# EAGLE board rectifier_board (EAGLE 9.6.2)
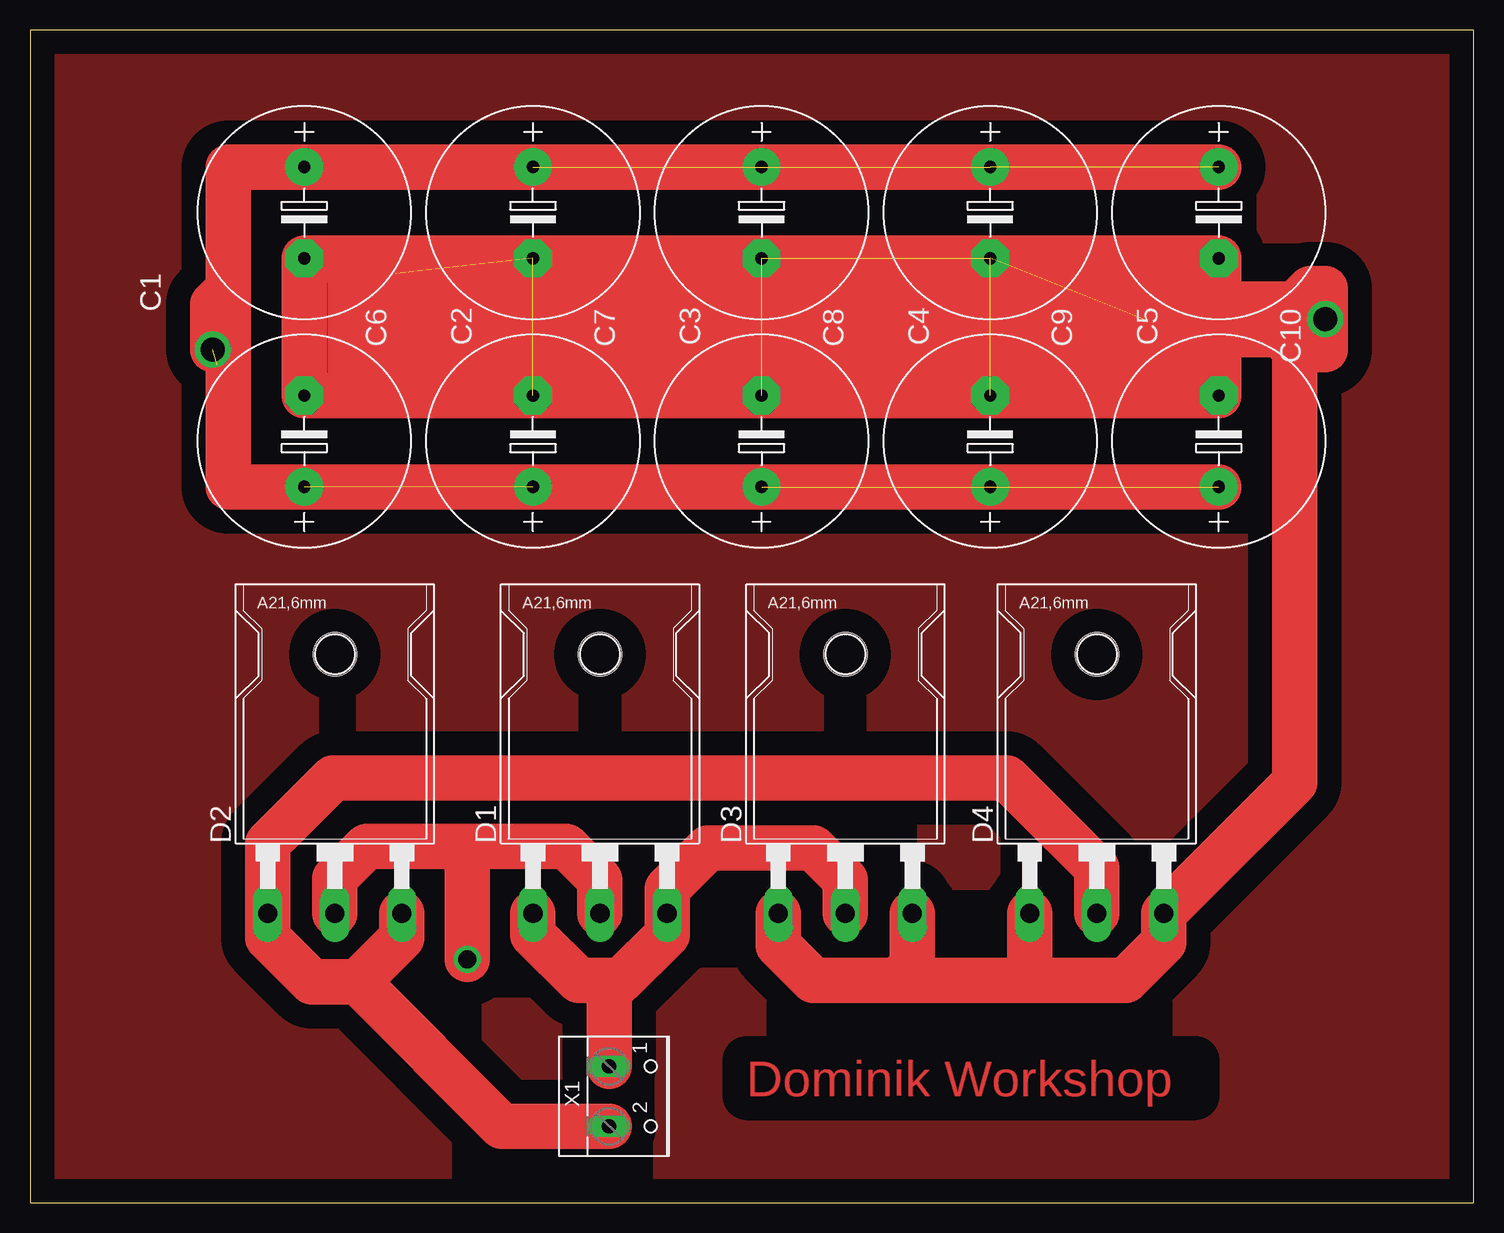
[diagram p0: board, top side]
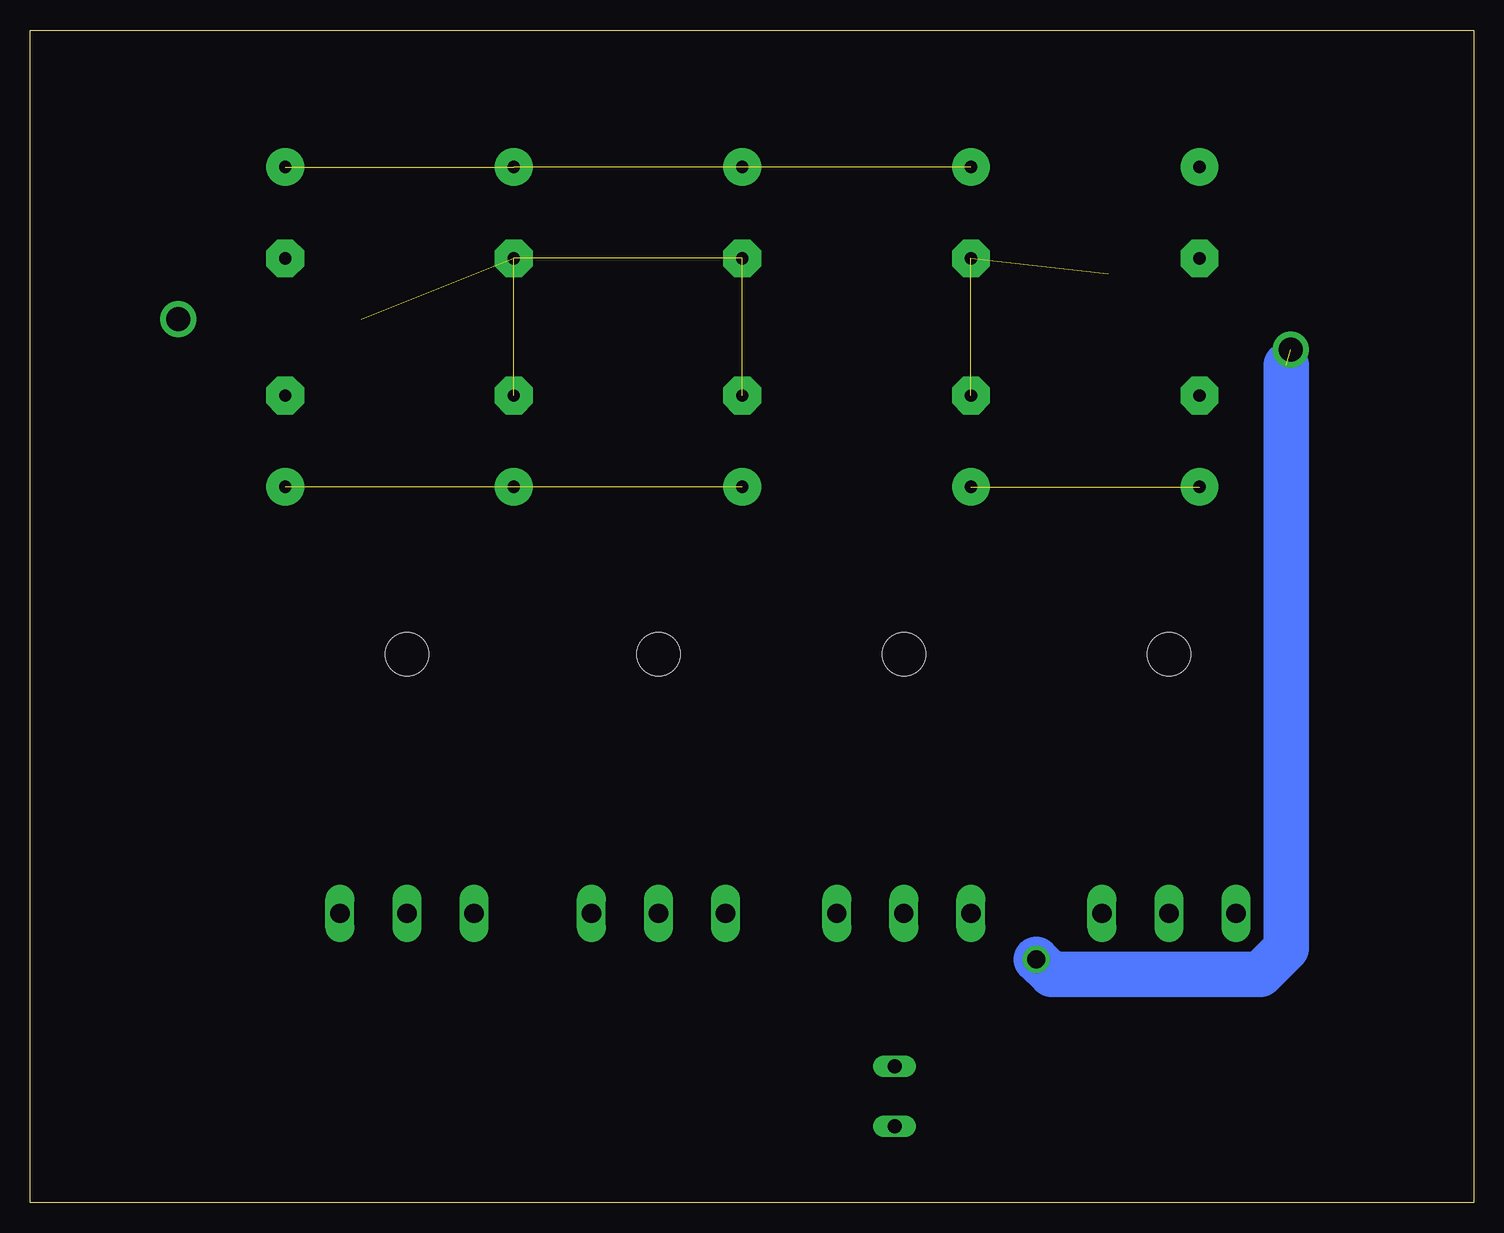
[diagram p1: board, bottom side, seen from below]

Size 120.32 x 97.78 mm. Coordinates in mm from the lower left corner, seen from the top.
Outline: 0,0 120.32,0 120.32,97.78 0,97.78 0,0
Copper layers (1*16): Top 0.035mm / dielectric 1.5mm / Bottom 0.035mm
Design rules "default": minimum track width 6mil, minimum drill 0.35mm, track to track 6mil, track to pad 6mil, pad to pad 6mil, via to via 6mil, smd to smd 6mil, copper to edge 40mil, drill to drill 6mil, minimum pad ring 10mil, minimum via ring 8mil, stop-mask expansion 4mil, vias tented up to drill 0mil, thermal gap 10mil

## Footprints (pad centres in the part's own frame; a part is rotated, then mirrored left to right if it is on the bottom)
E7,5-18 = drill 1.016 pad 3.15: + -3.81,0 | drill 1.016 pad 3.15 octagon: - 3.81,0
TO3P = drill 1.6 long: 1 -5.588,-7.62; 2 0,-7.62; 3 5.588,-7.62 | hole 3.607: 0,13.97
W237-102 = drill 1.194 long: 1 -2.5,-1.27; 2 2.5,-1.27

## Placement (x,y rotation side)
C1  [E7,5-18]  22.86,63.5 90 top
C2  [E7,5-18]  41.91,63.5 90 top
C3  [E7,5-18]  60.96,63.5 90 top
C4  [E7,5-18]  80.01,63.5 90 top
C5  [E7,5-18]  99.06,63.5 90 top
C6  [E7,5-18]  22.86,82.55 270 top
C7  [E7,5-18]  41.91,82.55 270 top
C8  [E7,5-18]  60.96,82.55 270 top
C9  [E7,5-18]  80.01,82.55 270 top
C10  [E7,5-18]  99.06,82.55 270 top
D1  FEP30AP  [TO3P]  47.5,31.75 0 top
D2  FEP30AP  [TO3P]  25.4,31.75 0 top
D3  FEP30AP  [TO3P]  67.94,31.75 0 top
D4  FEP30AP  [TO3P]  88.9,31.75 0 top
X1  [W237-102]  49.53,8.89 270 top

## Library data of the parts
C1-C10 = rcl; SPICEPREFIX: C
D1-D4 = diode
X1 = con-wago-500; MPN: 237-102; OC_FARNELL: unknown; OC_NEWARK: 70K9898

## Nets
N$1: D1.1 D1.3 D3.2 X1.1
N$2: D2.1 D2.3 D4.2 X1.2
N$4: C1.- C2.- C3.- C4.- C5.- C6.- C7.- C8.- C9.- C10.- D3.1 D3.3 D4.1 D4.3
N$5: C1.+ C2.+ C3.+ C4.+ C5.+ C6.+ C7.+ C8.+ C9.+ C10.+ D1.2 D2.2

## Tracks (layer width: path | path; a pad name or v marks a point on that pad's centre or on a via)
GND
  pour Top (isolate 2): 0,95.25 120.65,95.25 120.65,2.54 0,2.54
N$1
  Top 3.81: D1.1 41.91,22.35 45.72,18.54 49.28,18.54 | 49.28,18.54 53.09,22.35 D1.3 53.09,26.16 56.52,29.59 65.28,29.59 67.94,26.92 D3.2 | X1.1 48.26,17.53 49.28,18.54
N$2
  Top 3.81: 27.3,18.41 23.5,18.41 19.81,22.1 D2.1 19.81,29.97 25.27,35.43 81.41,35.43 88.9,27.94 D4.2 | 27.3,18.41 30.99,22.1 D2.3 | X1.2 39.33,6.39 27.3,18.41
N$4  (via drill 2)  (6 unrouted)
  Top 10.16: 30.48,73.66 92.71,73.66
  Top 2.54: 73.53,20.7 71.37,18.54 | 83.31,19.81 82.04,18.54
  Top 3.81: D3.1 62.36,21.46 65.28,18.54 71.37,18.54 82.04,18.54 91.31,18.54 94.49,21.72 D4.3 105.41,35.05 105.41,71.12 104.14,72.39 | D3.3 73.53,20.7 | D4.1 83.31,19.81 | 30.48,67.31 C1.- C6.- 25.4,78.74 | 30.48,67.31 96.52,67.31 | 96.52,67.31 C5.- 99.06,74.93 | 25.4,78.74 C10.- 99.06,74.93 | 25.4,78.74 26.67,77.47 26.67,68.58 | 30.48,67.31 30.48,73.66 30.48,77.47 | 96.52,67.31 95.25,68.58 95.25,72.39 | 95.25,72.39 95.25,77.47 | 104.14,72.39 95.25,72.39 | 99.06,74.93 105.41,74.93 106.68,76.2 107.95,76.2 v107.95,73.66 107.95,71.12 106.68,71.12 105.41,72.39 104.14,72.39
N$5  (via drill 1.5, 2)  (7 unrouted)
  Top 3.81: D2.2 25.4,27.05 28.07,29.72 35.56,29.72 | 35.56,29.72 44.7,29.72 47.5,26.92 D1.2 | C5.+ C1.+ 16.51,59.69 16.51,72.01 | C10.+ C6.+ 16.51,86.36 16.51,76.2 | 35.56,29.72 36.45,28.83 v36.45,20.32 | 16.51,72.39 15.62,71.5 15.62,71.12 16.51,72.01 | 16.51,72.01 16.51,72.39 | 16.51,76.2 16.51,72.39 | v15.24,71.12 15.24,74.93 16.51,76.2
  Bottom 3.81: v36.45,20.32 35.18,19.05 17.78,19.05 15.62,21.21 15.62,69.85

## Text on the board
Top: Dominik Workshop